# EAGLE board CT_schematic (EAGLE 7.6.0)

Size 100 x 80 mm. Coordinates in mm from the lower left corner, seen from the top.
Outline: 0,0 100,0 100,80 0,80 0,0
Copper layers (1*16): Top 0.035mm / dielectric 1.5mm / Bottom 0.035mm
Design rules "default": minimum track width 10mil, minimum drill 24mil, track to track 8mil, track to pad 8mil, pad to pad 8mil, via to via 8mil, smd to smd 8mil, copper to edge 40mil, drill to drill 8mil, minimum pad ring 10mil, minimum via ring 8mil, stop-mask expansion 4mil, vias tented up to drill 0mil, thermal gap 10mil

## Footprints (pad centres in the part's own frame; a part is rotated, then mirrored left to right if it is on the bottom)
C0603 = smd 0.8 x 0.8: 1 -0.762,0; 2 0.762,0
C0402 = smd 0.5 x 0.5: 1 -0.508,0; 2 0.508,0
C0805 = smd 1.2 x 1.3: 1 -1.016,0; 2 1.016,0
C1206 = smd 1.3 x 1.6: 1 -1.524,0; 2 1.524,0
C1210 = smd 1.2 x 2.5: 1 -1.524,0; 2 1.524,0
EXV-9H = smd 3.505 x 1.676: 1 -2.857,0; 2 2.857,0
L0603 = smd 0.8 x 0.8: 1 -0.762,0; 2 0.762,0
PJ-037B_PACKAGE = drill 3.7 square: 1 12,0 | drill 3.2 square: 2 6,0
R0603 = smd 0.8 x 0.8: 1 -0.762,0; 2 0.762,0
UFBGA176_25 = smd 0.3 x 0.3: A1 -4.55,4.55; A2 -3.9,4.55; A3 -3.25,4.55; A4 -2.6,4.55; A5 -1.95,4.55; A6 -1.3,4.55; A7 -0.65,4.55; A8 0,4.55; A9 0.65,4.55; A10 1.3,4.55; A11 1.95,4.55; A12 2.6,4.55; A13 3.25,4.55; A14 3.9,4.55; A15 4.55,4.55; B1 -4.55,3.9; B2 -3.9,3.9; B3 -3.25,3.9; B4 -2.6,3.9; B5 -1.95,3.9; B6 -1.3,3.9; B7 -0.65,3.9; B8 0,3.9; B9 0.65,3.9; B10 1.3,3.9; B11 1.95,3.9; B12 2.6,3.9; B13 3.25,3.9; B14 3.9,3.9; B15 4.55,3.9; C1 -4.55,3.25; C2 -3.9,3.25; C3 -3.25,3.25; C4 -2.6,3.25; C5 -1.95,3.25; C6 -1.3,3.25; C7 -0.65,3.25; C8 0,3.25; C9 0.65,3.25; C10 1.3,3.25; C11 1.95,3.25; C12 2.6,3.25; C13 3.25,3.25; C14 3.9,3.25; C15 4.55,3.25; D1 -4.55,2.6; D2 -3.9,2.6; D3 -3.25,2.6; D4 -2.6,2.6; D5 -1.95,2.6; D6 -1.3,2.6; D7 -0.65,2.6; D8 0,2.6; D9 0.65,2.6; D10 1.3,2.6; D11 1.95,2.6; D12 2.6,2.6; D13 3.25,2.6; D14 3.9,2.6; D15 4.55,2.6; E1 -4.55,1.95; E2 -3.9,1.95; E3 -3.25,1.95; E4 -2.6,1.95; E12 2.6,1.95; E13 3.25,1.95; E14 3.9,1.95; E15 4.55,1.95; F1 -4.55,1.3; F2 -3.9,1.3; F3 -3.25,1.3; F4 -2.6,1.3; F6 -1.3,1.3; F7 -0.65,1.3; F8 0,1.3; F9 0.65,1.3; F10 1.3,1.3; F12 2.6,1.3; F13 3.25,1.3; F14 3.9,1.3; F15 4.55,1.3; G1 -4.55,0.65; G2 -3.9,0.65; G3 -3.25,0.65; G4 -2.6,0.65; G6 -1.3,0.65; G7 -0.65,0.65; G8 0,0.65; G9 0.65,0.65; G10 1.3,0.65; G12 2.6,0.65; G13 3.25,0.65; G14 3.9,0.65; G15 4.55,0.65; H1 -4.55,0; H2 -3.9,0; H3 -3.25,0; H4 -2.6,0; H6 -1.3,0; H7 -0.65,0; H8 0,0; H9 0.65,0; H10 1.3,0; H12 2.6,0; H13 3.25,0; H14 3.9,0; H15 4.55,0; J1 -4.55,-0.65; J2 -3.9,-0.65; J3 -3.25,-0.65; J4 -2.6,-0.65; J6 -1.3,-0.65; J7 -0.65,-0.65; J8 0,-0.65; J9 0.65,-0.65; J10 1.3,-0.65; J12 2.6,-0.65; J13 3.25,-0.65; J14 3.9,-0.65; J15 4.55,-0.65; K1 -4.55,-1.3; K2 -3.9,-1.3; K3 -3.25,-1.3; K4 -2.6,-1.3; K6 -1.3,-1.3; K7 -0.65,-1.3; K8 0,-1.3; K9 0.65,-1.3; K10 1.3,-1.3; K12 2.6,-1.3; K13 3.25,-1.3; K14 3.9,-1.3; K15 4.55,-1.3; L1 -4.55,-1.95; L2 -3.9,-1.95; L3 -3.25,-1.95; L4 -2.6,-1.95; L12 2.6,-1.95; L13 3.25,-1.95; L14 3.9,-1.95; L15 4.55,-1.95; M1 -4.55,-2.6; M2 -3.9,-2.6; M3 -3.25,-2.6; M4 -2.6,-2.6; M5 -1.95,-2.6; M6 -1.3,-2.6; M7 -0.65,-2.6; M8 0,-2.6; M9 0.65,-2.6; M10 1.3,-2.6; M11 1.95,-2.6; M12 2.6,-2.6; M13 3.25,-2.6; M14 3.9,-2.6; M15 4.55,-2.6; N1 -4.55,-3.25; N2 -3.9,-3.25; N3 -3.25,-3.25; N4 -2.6,-3.25; N5 -1.95,-3.25; N6 -1.3,-3.25; N7 -0.65,-3.25; N8 0,-3.25; N9 0.65,-3.25; N10 1.3,-3.25; N11 1.95,-3.25; N12 2.6,-3.25; N13 3.25,-3.25; N14 3.9,-3.25; N15 4.55,-3.25; P1 -4.55,-3.9; P2 -3.9,-3.9; P3 -3.25,-3.9; P4 -2.6,-3.9; P5 -1.95,-3.9; P6 -1.3,-3.9; P7 -0.65,-3.9; P8 0,-3.9; P9 0.65,-3.9; P10 1.3,-3.9; P11 1.95,-3.9; P12 2.6,-3.9; P13 3.25,-3.9; P14 3.9,-3.9; P15 4.55,-3.9; R1 -4.55,-4.55; R2 -3.9,-4.55; R3 -3.25,-4.55; R4 -2.6,-4.55; R5 -1.95,-4.55; R6 -1.3,-4.55; R7 -0.65,-4.55; R8 0,-4.55; R9 0.65,-4.55; R10 1.3,-4.55; R11 1.95,-4.55; R12 2.6,-4.55; R13 3.25,-4.55; R14 3.9,-4.55; R15 4.55,-4.55
SOT-23-6 = smd 1.1 x 0.6: 1 -1.4,0.95; 2 -1.4,0; 3 -1.4,-0.95; 4 1.4,-0.95; 5 1.4,0; 6 1.4,0.95
ARDUCAM = drill 1 pad 1.8 square: 1 0,0 | drill 1 pad 1.8: 2 0,2.54; 3 2.54,0; 4 2.54,2.54; 5 5.08,0; 6 5.08,2.54; 7 7.62,0; 8 7.62,2.54; 9 10.16,0; 10 10.16,2.54; 11 12.7,0; 12 12.7,2.54; 13 15.24,0; 14 15.24,2.54; 15 17.78,0; 16 17.78,2.54; 17 20.32,0; 18 20.32,2.54; 19 22.86,0; 20 22.86,2.54
MOLEX_47219-2001 = smd 0.8 x 1.5: 1 3.2,-2.1; 2 2.1,-2.1; 3 1,-2.1; 4 -0.1,-2.1; 5 -1.2,-2.1; 6 -2.3,-2.1; 7 -3.4,-2.1; 8 -4.5,-2.1 | smd 1.5 x 2.05: G1 6.875,-4.7; G2 6.875,3.6; G3 -6.875,3.6; G4 -6.875,-4.7
LBGA-64 = smd 0.559 x 0.559: A1 -3.5,3.5; A2 -2.5,3.5; A3 -1.5,3.5; A4 -0.5,3.5; A5 0.5,3.5; A6 1.5,3.5; A7 2.5,3.5; A8 3.5,3.5; B1 -3.5,2.5; B2 -2.5,2.5; B3 -1.5,2.5; B4 -0.5,2.5; B5 0.5,2.5; B6 1.5,2.5; B7 2.5,2.5; B8 3.5,2.5; C1 -3.5,1.5; C2 -2.5,1.5; C3 -1.5,1.5; C4 -0.5,1.5; C5 0.5,1.5; C6 1.5,1.5; C7 2.5,1.5; C8 3.5,1.5; D1 -3.5,0.5; D2 -2.5,0.5; D3 -1.5,0.5; D4 -0.5,0.5; D5 0.5,0.5; D6 1.5,0.5; D7 2.5,0.5; D8 3.5,0.5; E1 -3.5,-0.5; E2 -2.5,-0.5; E3 -1.5,-0.5; E4 -0.5,-0.5; E5 0.5,-0.5; E6 1.5,-0.5; E7 2.5,-0.5; E8 3.5,-0.5; F1 -3.5,-1.5; F2 -2.5,-1.5; F3 -1.5,-1.5; F4 -0.5,-1.5; F5 0.5,-1.5; F6 1.5,-1.5; F7 2.5,-1.5; F8 3.5,-1.5; G1 -3.5,-2.5; G2 -2.5,-2.5; G3 -1.5,-2.5; G4 -0.5,-2.5; G5 0.5,-2.5; G6 1.5,-2.5; G7 2.5,-2.5; G8 3.5,-2.5; H1 -3.5,-3.5; H2 -2.5,-3.5; H3 -1.5,-3.5; H4 -0.5,-3.5; H5 0.5,-3.5; H6 1.5,-3.5; H7 2.5,-3.5; H8 3.5,-3.5
MICRO_USB_AB = smd 0.4 x 1.35: 1 1.3,0.26; 2 0.65,0.26; 3 0,0.26; 4 -0.65,0.26; 5 -1.3,0.26 | drill 0.6 pad 0.95 long: 6 4.175,-2.54; 7 -4.175,-2.54 | drill 0.7 pad 1.1 long: 8 -2.225,0.46; 9 2.225,0.46
SOT143B = smd 1 x 0.7: 1 -0.75,-1 | smd 0.6 x 0.7: 2 0.95,-1; 3 0.95,1; 4 -0.95,1
ABLS-25.000MHZ-B2F-T = smd 5.6 x 2.8: 1 -3.81,0; 2 5.69,0
ASEK = smd 1.4 x 1: 1 -1.1,-0.8; 2 1.1,-0.8; 3 1.1,0.8; 4 -1.1,0.8
ASFL1 = smd 1.7 x 1.5: 1 -1.27,-1.1; 2 1.27,-1.1; 3 1.27,1.1; 4 -1.27,1.1
WSON-8 = smd 0.3 x 0.6: 1 -0.75,0; 2 0.05,0; 3 0.85,0; 4 1.65,0; 5 1.65,3.8; 6 0.85,3.8; 7 0.05,3.8; 8 -0.75,3.8 | smd 3 x 2.6: PAD 0.45,1.9
SON-6 = smd 0.55 x 0.3: 1 -0.355,0.5 | smd 0.52 x 0.3: 2 -0.37,0; 3 -0.37,-0.5; 4 0.37,-0.5; 5 0.37,0; 6 0.37,0.5
SW_4-1437565-2 = smd 1.4 x 2.1: 1 -2.23,4.55; 2 -2.23,-4.55; 3 2.23,4.55; 4 2.23,-4.55
LGM67K-G1J2-24-Z = smd 0.8 x 1.4: A -2,0; C 0,0
NC7SZ125M5X = smd 1.3 x 0.7: 1 -1.3,0.95; 2 -1.3,0; 3 -1.3,-0.95; 4 1.3,-0.95; 5 1.3,0.95

## Placement (x,y rotation side)
C1  1e-06  [C0603]  -43.18,67.31 0 top  (outside the outline)
C2  1e-07  [C0603]  -46.99,67.31 0 top  (outside the outline)
C3  1e-07  [C0603]  -50.8,67.31 0 top  (outside the outline)
C4  1e-07  [C0603]  -54.61,67.31 0 top  (outside the outline)
C5  1e-07  [C0603]  -58.42,67.31 0 top  (outside the outline)
C6  1e-07  [C0603]  -62.23,67.31 0 top  (outside the outline)
C7  1e-07  [C0603]  -66.04,67.31 0 top  (outside the outline)
C8  1e-07  [C0603]  -69.85,67.31 0 top  (outside the outline)
C9  1e-07  [C0603]  -73.66,67.31 0 top  (outside the outline)
C10  1e-07  [C0603]  -77.47,67.31 0 top  (outside the outline)
C11  1e-07  [C0603]  -15.24,72.39 0 top  (outside the outline)
C12  1e-07  [C0603]  -19.05,72.39 0 top  (outside the outline)
C13  1e-07  [C0603]  -22.86,72.39 0 top  (outside the outline)
C14  1e-07  [C0603]  -26.67,72.39 0 top  (outside the outline)
C15  1e-07  [C0603]  -30.48,72.39 0 top  (outside the outline)
C16  1e-07  [C0603]  -34.29,72.39 0 top  (outside the outline)
C17  4.7e-06  [C0603]  -39.37,67.31 0 top  (outside the outline)
C18  1e-08  [C0603]  -38.1,72.39 0 top  (outside the outline)
C19  1e-06  [C0603]  -41.91,72.39 0 top  (outside the outline)
C20  1e-07  [C0402]  -30.48,77.47 0 top  (outside the outline)
C21  1e-07  [C0402]  -34.29,77.47 0 top  (outside the outline)
C22  1e-11  [C0402]  -38.1,77.47 0 top  (outside the outline)
C23  1e-11  [C0402]  -41.91,77.47 0 top  (outside the outline)
C24  1e-06  [C0603]  -45.72,72.39 0 top  (outside the outline)
C25  1e-07  [C0402]  -45.72,77.47 0 top  (outside the outline)
C26  1e-05  [C0805]  -45.72,57.15 0 top  (outside the outline)
C27  1e-08  [C0402]  -49.53,77.47 0 top  (outside the outline)
C28  1e-08  [C0402]  -53.34,77.47 0 top  (outside the outline)
C29  1e-08  [C0402]  -57.15,77.47 0 top  (outside the outline)
C30  1e-08  [C0402]  -60.96,77.47 0 top  (outside the outline)
C31  1e-08  [C0402]  -64.77,77.47 0 top  (outside the outline)
C32  1e-05  [C1206]  -72.39,49.53 0 top  (outside the outline)
C33  1e-05  [C0805]  -50.8,57.15 0 top  (outside the outline)
C34  1e-08  [C0402]  -68.58,77.47 0 top  (outside the outline)
C35  1e-05  [C1206]  -78.74,49.53 0 top  (outside the outline)
C36  1e-05  [C1210]  -59.69,50.8 0 top  (outside the outline)
C37  1e-08  [C0402]  -72.39,77.47 0 top  (outside the outline)
C38  1e-05  [C1206]  -16.51,57.15 0 top  (outside the outline)
C39  1e-05  [C1210]  -66.04,50.8 0 top  (outside the outline)
C40  1e-07  [C0402]  -76.2,77.47 0 top  (outside the outline)
C41  0.0001  [EXV-9H]  -38.1,43.18 0 top  (outside the outline)
C42  0.0001  [EXV-9H]  -49.53,43.18 0 top  (outside the outline)
C43  1e-08  [C0402]  -80.01,77.47 0 top  (outside the outline)
C44  1e-08  [C0402]  -15.24,82.55 0 top  (outside the outline)
C45  1e-08  [C0402]  -19.05,82.55 0 top  (outside the outline)
F1  240.0  [L0603]  -49.53,72.39 0 top  (outside the outline)
J1  PJ-037B  [PJ-037B_PACKAGE]  -76.2,7.62 0 top  (outside the outline)
R2  1000.0  [R0603]  -53.34,72.39 0 top  (outside the outline)
R4  4700.0  [R0603]  -57.15,72.39 0 top  (outside the outline)
R5  4700.0  [R0603]  -60.96,72.39 0 top  (outside the outline)
R6  4700.0  [R0603]  -64.77,72.39 0 top  (outside the outline)
R7  47000.0  [R0603]  -45.72,62.23 0 top  (outside the outline)
R8  10000.0  [R0603]  -50.8,62.23 0 top  (outside the outline)
R9  10000.0  [R0603]  -55.88,62.23 0 top  (outside the outline)
R10  10000.0  [R0603]  -60.96,62.23 0 top  (outside the outline)
R11  10000.0  [R0603]  -66.04,62.23 0 top  (outside the outline)
R12  100000.0  [R0603]  -55.88,57.15 0 top  (outside the outline)
R13  100000.0  [R0603]  -60.96,57.15 0 top  (outside the outline)
R14  100000.0  [R0603]  -66.04,57.15 0 top  (outside the outline)
R15  100000.0  [R0603]  -71.12,57.15 0 top  (outside the outline)
R16  100000.0  [R0603]  -76.2,57.15 0 top  (outside the outline)
R17  100000.0  [R0603]  -15.24,62.23 0 top  (outside the outline)
R18  10000.0  [R0603]  -71.12,62.23 0 top  (outside the outline)
R19  10000.0  [R0603]  -76.2,62.23 0 top  (outside the outline)
R20  10000.0  [R0603]  -15.24,67.31 0 top  (outside the outline)
R21  10000.0  [R0603]  -20.32,67.31 0 top  (outside the outline)
R22  10000.0  [R0603]  -25.4,67.31 0 top  (outside the outline)
R23  100000.0  [R0603]  -20.32,62.23 0 top  (outside the outline)
R24  200.0  [R0603]  -68.58,72.39 0 top  (outside the outline)
R25  1000.0  [R0603]  -72.39,72.39 0 top  (outside the outline)
R26  100000.0  [R0603]  -25.4,62.23 0 top  (outside the outline)
R27  2231.0  [R0603]  -76.2,72.39 0 top  (outside the outline)
R28  1000.0  [R0603]  -15.24,77.47 0 top  (outside the outline)
R29  100000.0  [R0603]  -30.48,62.23 0 top  (outside the outline)
R30  3900.0  [R0603]  -19.05,77.47 0 top  (outside the outline)
R31  1000.0  [R0603]  -22.86,77.47 0 top  (outside the outline)
R32  10000.0  [R0603]  -30.48,67.31 0 top  (outside the outline)
R33  10000.0  [R0603]  -35.56,67.31 0 top  (outside the outline)
R34  9100.0  [R0603]  -26.67,77.47 0 top  (outside the outline)
R35  680000.0  [R0603]  -35.56,62.23 0 top  (outside the outline)
R36  120000.0  [R0603]  -40.64,62.23 0 top  (outside the outline)
U1  STM32F217IEH6  [UFBGA176_25]  -53.34,6.35 0 top  (outside the outline)
U2  MAX4995AAUT+T  [SOT-23-6]  -21.59,55.88 0 top  (outside the outline)
U3  arducam_ov2640  [ARDUCAM]  -40.64,48.26 0 top  (outside the outline)
U4  0472192001  [MOLEX_47219-2001]  -22.86,8.89 0 top  (outside the outline)
U5  MT28EW128ABA1HPC-0SIT  [LBGA-64]  -39.37,7.62 0 top  (outside the outline)
U6  47590-0001  [MICRO_USB_AB]  -20.32,25.4 0 top  (outside the outline)
U7  prtr5v0u2ax  [SOT143B]  -31.75,82.55 0 top  (outside the outline)
U8  ABLS-25.000MHZ-B2F-T  [ABLS-25.000MHZ-B2F-T]  -68.58,43.18 0 top  (outside the outline)
U9  ASEK-32.768KHz-ECST  [ASEK]  -29.21,43.18 0 top  (outside the outline)
U10  ASFL1-25MHZ-NCS  [ASFL1]  -67.31,34.29 0 top  (outside the outline)
U11  LP3878SDX-ADJ/NOPB  [WSON-8]  -62.23,20.32 0 top  (outside the outline)
U12  LP3878SDX-ADJ/NOPB  [WSON-8]  -30.48,33.02 0 top  (outside the outline)
U13  LP3878SDX-ADJ/NOPB  [WSON-8]  -50.8,33.02 0 top  (outside the outline)
U14  TPS3895ADRYR  [SON-6]  -35.56,81.28 0 top  (outside the outline)
U15  4-1437565-2  [SW_4-1437565-2]  -40.64,22.86 0 top  (outside the outline)
U16  Q65110A2395  [LGM67K-G1J2-24-Z]  -48.26,50.8 0 top  (outside the outline)
U17  nc7sz125m5x  [NC7SZ125M5X]  -26.67,55.88 0 top  (outside the outline)
U18  nc7sz125m5x  [NC7SZ125M5X]  -33.02,55.88 0 top  (outside the outline)
U19  nc7sz125m5x  [NC7SZ125M5X]  -39.37,55.88 0 top  (outside the outline)

## Library data of the parts
C1-C45 F1 J1 R2 R4-R36 U1-U19 = circuit_tree

## Nets
CLK_CRYSTAL_U1_G1: C22.1 U1.G1 U8.1
CLK_CRYSTAL_U1_H1: C23.1 U1.H1 U8.2
CLK_U1_E1: U1.E1 U9.3
CLK_U3_8: U3.8 U10.3
GND: C1.2 C2.2 C3.2 C4.2 C5.2 C6.2 C7.2 C8.2 C9.2 C10.2 C11.2 C12.2 C13.2 C14.2 C15.2 C16.2 C17.2 C18.2 C19.2 C20.2 C21.2 C22.2 C23.2 C24.2 C25.2 C26.2 C27.2 C28.2 C29.2 C30.2 C31.2 C32.2 C33.2 C34.2 C35.2 C36.2 C37.2 C38.2 C39.2 C40.2 C41.2 C42.2 C43.2 C44.2 C45.2 J1.2 R2.2 R7.2 R8.2 R11.2 R25.2 R28.2 R31.2 R34.2 R36.2 U1.D5 U1.D7 U1.D8 U1.D9 U1.F2 U1.F6 U1.F7 U1.F8 U1.F9 U1.F10 U1.F12 U1.G2 U1.G6 U1.G7 U1.G8 U1.G9 U1.G10 U1.G12 U1.H6 U1.H7 U1.H8 U1.H9 U1.H10 U1.H12 U1.J6 U1.J7 U1.J8 U1.J9 U1.J10 U1.K6 U1.K7 U1.K8 U1.K9 U1.K10 U1.M1 U1.M8 U1.M9 U1.N1 U2.2 U3.2 U3.20 U4.6 U4.G1 U4.G2 U4.G3 U4.G4 U5.E8 U5.H2 U5.H7 U6.5 U6.6 U6.7 U6.8 U6.9 U7.1 U9.2 U10.2 U11.3 U11.PAD U12.3 U12.PAD U13.3 U13.PAD U14.2 U16.C U17.1 U17.3 U18.1 U18.3 U19.1 U19.3
NET_U1_D6: R8.1 U1.D6
NET_U1_F13: C21.1 U1.F13
NET_U1_J1: R5.1 U1.J1 U18.4
NET_U1_L4: R9.1 U1.L4
NET_U1_R1: C18.1 C19.1 F1.1 U1.P1 U1.R1
NET_U1_R14: U16.A
NET_U1_R15: U15.3 U15.4
NET_U2_3: R7.1 U2.3
NET_U3_19: R6.1 U3.19 U19.4
NET_U5_B4: R21.1 U5.B4
NET_U5_B5: R4.1 U5.B5 U17.4
NET_U11_1: C31.1 U11.1
NET_U11_6: R24.2 R25.1 U11.6
NET_U11_8: R23.1 U11.8
NET_U12_1: C34.1 U12.1
NET_U12_6: R27.2 R28.1 U12.6
NET_U12_8: R26.1 U12.8
NET_U13_1: C37.1 U13.1
NET_U13_6: R30.2 R31.1 U13.6
NET_U13_8: R29.1 U13.8
NET_U14_1: R33.1 R34.1 U14.1
NET_U14_3: R35.2 R36.1 U14.3
NET_U14_4: R32.1 U14.4 U17.2 U18.2 U19.2
NET_U15_1: R2.1 U15.1 U15.2
PROC_DCMI_D0: U1.H15 U3.18
PROC_DCMI_D1: U1.G15 U3.17
PROC_DCMI_D2: U1.L12 U3.16
PROC_DCMI_D3: U1.A3 U3.15
PROC_DCMI_D4: U1.E13 U3.14
PROC_DCMI_D5: U1.B6 U3.13
PROC_DCMI_D6: U1.A5 U3.12
PROC_DCMI_D7: U1.B4 U3.11
PROC_DCMI_D8: U1.D14 U3.10
PROC_DCMI_D9: U1.C14 U3.9
PROC_DCMI_HSYNC: U1.M12 U3.6
PROC_DCMI_PIXCK: U1.P3 U3.7
PROC_DCMI_VSYNC: U1.B5 U3.5
PROC_FSMC_A0: U1.E2 U5.E2
PROC_FSMC_A1: U1.H3 U5.D2
PROC_FSMC_A2: U1.H2 U5.C2
PROC_FSMC_A3: U1.J2 U5.A2
PROC_FSMC_A4: U1.J3 U5.B2
PROC_FSMC_A5: U1.K3 U5.D3
PROC_FSMC_A6: U1.P6 U5.C3
PROC_FSMC_A7: U1.N6 U5.A3
PROC_FSMC_A8: U1.R7 U5.B6
PROC_FSMC_A9: U1.P7 U5.A6
PROC_FSMC_A10: U1.N7 U5.C6
PROC_FSMC_A11: U1.M7 U5.D6
PROC_FSMC_A12: U1.L15 U5.B7
PROC_FSMC_A13: U1.K15 U5.A7
PROC_FSMC_A14: U1.K14 U5.C7
PROC_FSMC_A15: U1.K13 U5.D7
PROC_FSMC_A16: U1.N14 U5.E7
PROC_FSMC_A17: U1.N13 U5.B3
PROC_FSMC_A18: U1.M15 U5.C4
PROC_FSMC_A19: U1.A1 U5.D5
PROC_FSMC_A20: U1.B1 U5.D4
PROC_FSMC_A21: U1.B2 U5.C5
PROC_FSMC_A22: U1.B3 U5.B8
PROC_FSMC_D0: U1.M14 U5.E3
PROC_FSMC_D1: U1.L14 U5.H3
PROC_FSMC_D2: U1.B12 U5.E4
PROC_FSMC_D3: U1.C12 U5.H4
PROC_FSMC_D4: U1.R8 U5.H5
PROC_FSMC_D5: U1.P8 U5.E5
PROC_FSMC_D6: U1.P9 U5.H6
PROC_FSMC_D7: U1.R9 U5.E6
PROC_FSMC_D8: U1.P10 U5.F3
PROC_FSMC_D9: U1.R10 U5.G3
PROC_FSMC_D10: U1.N11 U5.F4
PROC_FSMC_D11: U1.P11 U5.G4
PROC_FSMC_D12: U1.R11 U5.F5
PROC_FSMC_D13: U1.P15 U5.G6
PROC_FSMC_D14: U1.P14 U5.F6
PROC_FSMC_D15: U1.N15 U5.G7
PROC_FSMC_NBL0: R22.1 U1.A4 U5.F7
PROC_FSMC_NE4: R18.1 U1.B8 U5.F2
PROC_FSMC_NOE: R19.1 U1.D10 U5.G2
PROC_FSMC_NWAIT: U1.B11 U5.A4
PROC_FSMC_NWE: R20.1 U1.C11 U5.A5
PROC_GPIO_TO_U1_USB_FAULT: R10.1 U1.A6 U2.6
PROC_GPIO_TO_U1_VBUS_EN: R11.1 U1.A2 U2.4
PROC_SDIO_CK: R13.1 U1.A12 U4.5
PROC_SDIO_CMD: R12.1 U1.D12 U4.3
PROC_SDIO_D0: R14.1 U1.G14 U4.7
PROC_SDIO_D1: R15.1 U1.F14 U4.8
PROC_SDIO_D2: R16.1 U1.B14 U4.1
PROC_SDIO_D3: R17.1 U1.B13 U4.2
PROC_USB_OTG_FS_DM: U6.2 U7.3
PROC_USB_OTG_FS_DP: U6.3 U7.2
PROC_USB_OTG_FS_ID: U6.4
PROC_USB_OTG_FS_VBUS: U2.1 U6.1 U7.4
VCC_S1_9V5: C32.1 C35.1 C38.1 C41.1 C42.1 J1.1 R23.2 R26.2 R29.2 U11.4 U12.4 U13.4
VCC_TIER1_1V2: C20.1 C33.1 R24.1 U1.M10 U11.5
VCC_TIER1_3V3: C1.1 C2.1 C3.1 C4.1 C5.1 C6.1 C7.1 C8.1 C9.1 C10.1 C11.1 C12.1 C13.1 C14.1 C15.1 C16.1 C17.1 C24.1 C25.1 C26.1 C27.1 C28.1 C29.1 C30.1 C36.1 C40.1 C43.1 C44.1 C45.1 F1.2 R4.2 R5.2 R6.2 R9.2 R10.2 R12.2 R13.2 R14.2 R15.2 R16.2 R17.2 R18.2 R19.2 R20.2 R21.2 R22.2 R27.1 R32.2 R33.2 R35.1 U1.C1 U1.C5 U1.C7 U1.C8 U1.C9 U1.F3 U1.G3 U1.G13 U1.H13 U1.J12 U1.J13 U1.K4 U1.N8 U1.N9 U1.N10 U3.1 U4.4 U5.D8 U5.F1 U5.G5 U9.4 U10.4 U12.5 U14.6 U17.5 U18.5 U19.5
VCC_TIER1_5V0: C39.1 R30.1 U2.5 U13.5

## Tracks (layer width: path | path; a pad name or v marks a point on that pad's centre or on a via)
CLK_CRYSTAL_U1_G1  (2 unrouted)
CLK_CRYSTAL_U1_H1  (2 unrouted)
CLK_U1_E1  (1 unrouted)
CLK_U3_8  (1 unrouted)
GND  (125 unrouted)
NET_U1_D6  (1 unrouted)
NET_U1_F13  (1 unrouted)
NET_U1_J1  (2 unrouted)
NET_U1_L4  (1 unrouted)
NET_U1_R1  (4 unrouted)
NET_U1_R15  (1 unrouted)
NET_U2_3  (1 unrouted)
NET_U3_19  (2 unrouted)
NET_U5_B4  (1 unrouted)
NET_U5_B5  (2 unrouted)
NET_U11_1  (1 unrouted)
NET_U11_6  (2 unrouted)
NET_U11_8  (1 unrouted)
NET_U12_1  (1 unrouted)
NET_U12_6  (2 unrouted)
NET_U12_8  (1 unrouted)
NET_U13_1  (1 unrouted)
NET_U13_6  (2 unrouted)
NET_U13_8  (1 unrouted)
NET_U14_1  (2 unrouted)
NET_U14_3  (2 unrouted)
NET_U14_4  (4 unrouted)
NET_U15_1  (2 unrouted)
PROC_DCMI_D0  (1 unrouted)
PROC_DCMI_D1  (1 unrouted)
PROC_DCMI_D2  (1 unrouted)
PROC_DCMI_D3  (1 unrouted)
PROC_DCMI_D4  (1 unrouted)
PROC_DCMI_D5  (1 unrouted)
PROC_DCMI_D6  (1 unrouted)
PROC_DCMI_D7  (1 unrouted)
PROC_DCMI_D8  (1 unrouted)
PROC_DCMI_D9  (1 unrouted)
PROC_DCMI_HSYNC  (1 unrouted)
PROC_DCMI_PIXCK  (1 unrouted)
PROC_DCMI_VSYNC  (1 unrouted)
PROC_FSMC_A0  (1 unrouted)
PROC_FSMC_A1  (1 unrouted)
PROC_FSMC_A2  (1 unrouted)
PROC_FSMC_A3  (1 unrouted)
PROC_FSMC_A4  (1 unrouted)
PROC_FSMC_A5  (1 unrouted)
PROC_FSMC_A6  (1 unrouted)
PROC_FSMC_A7  (1 unrouted)
PROC_FSMC_A8  (1 unrouted)
PROC_FSMC_A9  (1 unrouted)
PROC_FSMC_A10  (1 unrouted)
PROC_FSMC_A11  (1 unrouted)
PROC_FSMC_A12  (1 unrouted)
PROC_FSMC_A13  (1 unrouted)
PROC_FSMC_A14  (1 unrouted)
PROC_FSMC_A15  (1 unrouted)
PROC_FSMC_A16  (1 unrouted)
PROC_FSMC_A17  (1 unrouted)
PROC_FSMC_A18  (1 unrouted)
PROC_FSMC_A19  (1 unrouted)
PROC_FSMC_A20  (1 unrouted)
PROC_FSMC_A21  (1 unrouted)
PROC_FSMC_A22  (1 unrouted)
PROC_FSMC_D0  (1 unrouted)
PROC_FSMC_D1  (1 unrouted)
PROC_FSMC_D2  (1 unrouted)
PROC_FSMC_D3  (1 unrouted)
PROC_FSMC_D4  (1 unrouted)
PROC_FSMC_D5  (1 unrouted)
PROC_FSMC_D6  (1 unrouted)
PROC_FSMC_D7  (1 unrouted)
PROC_FSMC_D8  (1 unrouted)
PROC_FSMC_D9  (1 unrouted)
PROC_FSMC_D10  (1 unrouted)
PROC_FSMC_D11  (1 unrouted)
PROC_FSMC_D12  (1 unrouted)
PROC_FSMC_D13  (1 unrouted)
PROC_FSMC_D14  (1 unrouted)
PROC_FSMC_D15  (1 unrouted)
PROC_FSMC_NBL0  (2 unrouted)
PROC_FSMC_NE4  (2 unrouted)
PROC_FSMC_NOE  (2 unrouted)
PROC_FSMC_NWAIT  (1 unrouted)
PROC_FSMC_NWE  (2 unrouted)
PROC_GPIO_TO_U1_USB_FAULT  (2 unrouted)
PROC_GPIO_TO_U1_VBUS_EN  (2 unrouted)
PROC_SDIO_CK  (2 unrouted)
PROC_SDIO_CMD  (2 unrouted)
PROC_SDIO_D0  (2 unrouted)
PROC_SDIO_D1  (2 unrouted)
PROC_SDIO_D2  (2 unrouted)
PROC_SDIO_D3  (2 unrouted)
PROC_USB_OTG_FS_DM  (1 unrouted)
PROC_USB_OTG_FS_DP  (1 unrouted)
PROC_USB_OTG_FS_VBUS  (2 unrouted)
VCC_S1_9V5  (11 unrouted)
VCC_TIER1_1V2  (4 unrouted)
VCC_TIER1_3V3  (76 unrouted)
VCC_TIER1_5V0  (3 unrouted)